# Altium PCB FMC_DAC_PSU.PcbDoc (part 2 of 3)
Units mil, origin at the board's own origin, x right, y up, seen from the top; angles counter-clockwise.
Board outline 748.03 x 2716.54 mil, 6 copper layers (TOP, G1, L2, L3, P4, BOTTOM), stack 50.473 mil thick; 122 components, 60 nets, 337 pads, 202 vias.
Unrouted connection lines stored in the file: 1.
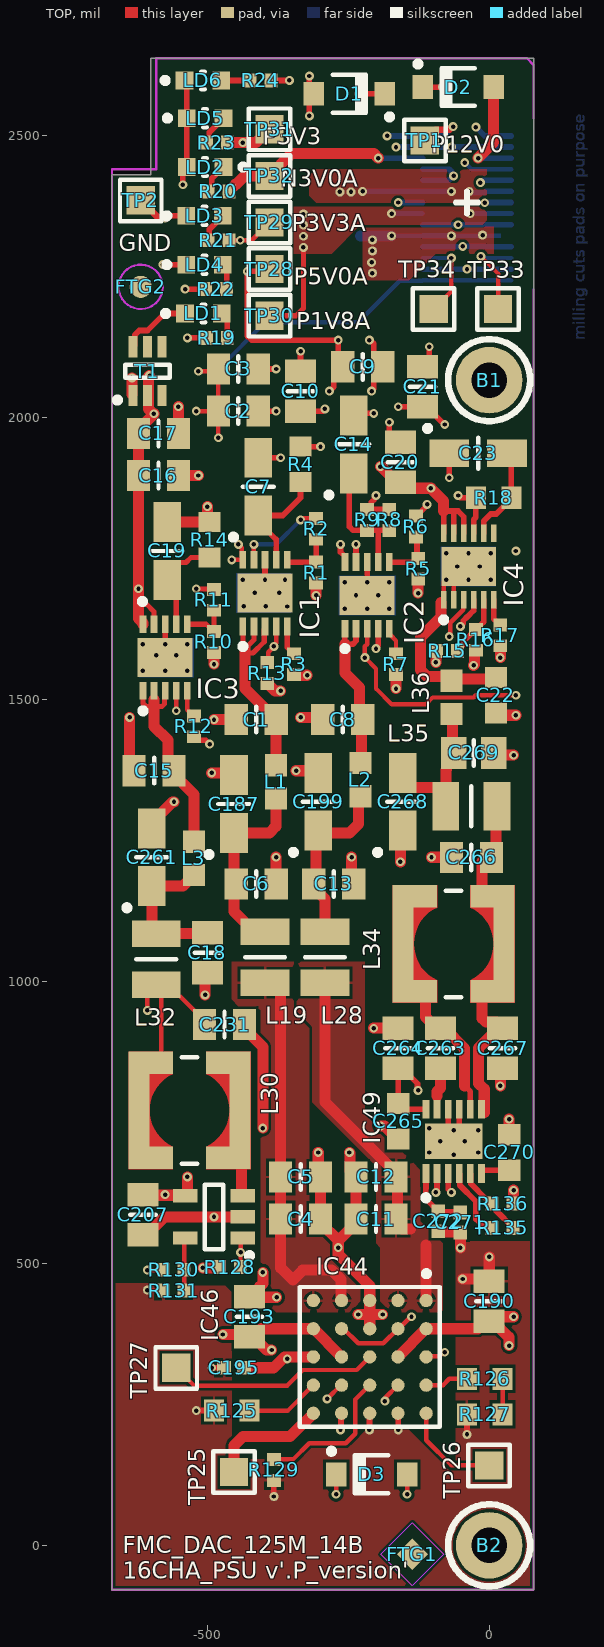
[diagram p0: TOP view]

## Part data (continued)
R131: library part R0402_18K_1%_0.0625W_100PPM, "Resistor - 1%", Case=0402, Manufacturer=GENERIC, Manufacturer1 ComponentHeight=0.4mm, Manufacturer1 Example="YAGEO PHYCOMP", Manufacturer1 Part Number=232270671803L, Power=0.0625W, Tolerance=±1%, Author="CERN DEM JLC", Component Type=Standard, CreateDate=03/12/2007, HelpURL=\\cern.ch\dfs\Applications\Altium\Datasheets\R0402_Phycomp_RC0402.pdf, LatestRevisionDate=17/10/2012, Manufacturer Part Number=R0402_18K_1%_0.0625W_100PPM, Mounted=Yes, Part Description="General Purpose Thick Film Chip Resistor", Part Number=R0402_18K_1%_0.0625W_100PPM, Pin Count=2, PressFit=No, Sense=No, SMD=Yes, Socket=No, Status="Not Recommended", TC=±100ppm/°C
R135: library part R0402_150K_1%_0.0625W_100PPM, "Resistor - 1%", Case=0402, Manufacturer=GENERIC, Manufacturer1 ComponentHeight=0.4mm, Manufacturer1 Example="YAGEO PHYCOMP", Manufacturer1 Part Number=232270671504L, Power=0.0625W, Tolerance=±1%, Author="CERN DEM JLC", Component Type=Standard, CreateDate=03/12/2007, HelpURL=\\cern.ch\dfs\Applications\Altium\Datasheets\R0402_Phycomp_RC0402.pdf, LatestRevisionDate=17/10/2012, Manufacturer Part Number=R0402_150K_1%_0.0625W_100PPM, Mounted=Yes, Part Description="General Purpose Thick Film Chip Resistor", Part Number=R0402_150K_1%_0.0625W_100PPM, Pin Count=2, PressFit=No, Sense=No, SMD=Yes, Socket=No, Status="Not Recommended", TC=±100ppm/°C
SCREW1 SCREW2: library part MECH_SCREW_M1.6x4, "Screw", Manufacturer=BOSSARD, Manufacturer Part Number=B1.6X4/BN660, Part Number=BOSSARD_B1.6X4/BN660, Author=GK, Component Type=Mechanical, ComponentHeight=1mm, CreateDate=04.12.2015, HelpURL=\\cern.ch\dfs\Applications\Altium\Datasheets\BOSSARD_BN650-1243721.pdf, LatestRevisionDate=04.12.2015, Mounted=Yes, PackageDescription="M1.6 L=4mm Philips Head Machine Screw, DIN 7985A, Stainless Steel A2", Part Description="M1.6 L=4mm Philips Head Machine Screw, DIN 7985A, Stainless Steel A2", Pin Count=0, PressFit=No, Sense=No, SMD=No, Socket=No, Status=None
T1: "Dual N-Channel micro TrenchMOS™ Ultra Low Level FET", Case=SOT363, Manufacturer="NXP SEMICONDUCTORS", Author="CERN DEM JLC", Bonding=No, Component Type=Standard, ComponentHeight=1.1mm, CreateDate=19/11/2014, Device=PMGD280UN, HelpURL=\\cern.ch\dfs\Applications\Altium\Datasheets\PMGD280UN.pdf, LatestRevisionDate=19/11/2014, Manufacturer Part Number=PMGD280UN, Mounted=Yes, PackageDescription="SOT363, SC70-6, SOT, 0.65mm Pitch, 6 pin, 1.25mm W X 2.00mm L X 1.10mm H, IPC Medium Density", Part Description="20V 870mA Dual N-Channel micro TrenchMOS™ Ultra Low Level FET", Part Number=PMGD280UN, Pin Count=6, PressFit=No, Sense=No, SMD=Yes, Socket=No
TP1 TP2 TP25 TP26 TP27 TP28 TP29 TP30 TP31 TP32 TP33 TP34: library part SMD_PAD_1.27X1.27MM, Author="CERN DEM JLC", Component Type="Standard (No BOM)", ComponentHeight=0mm, CreateDate=12.01.2008, Family="Test Point", HelpURL=Undefined, LatestRevisionDate=12.01.2008, Mounted=No, PackageDescription="1.27mm x 1.27mm PCB Copper Area (SMD Test Point)", Part Description="1.27mm x 1.27mm PCB Copper Area (SMD Test Point)", Part Number=SMD_PAD_1.27X1.27MM, Pin Count=1, Sense=No, SMD=Yes, Socket=No, Status=None

## Via types
v1: diameter 15.75, hole 7.87, TOP to BOTTOM, tented both sides, 202 vias